# Altium PCB motor_driver.PcbDoc (part 3 of 4)
Units mil, origin at the board's own origin, x right, y up, seen from the top; angles counter-clockwise.
Board outline 2915 x 1500 mil, 2 copper layers (Top Layer, Bottom Layer); 45 components, 39 nets, 213 pads, 173 vias.
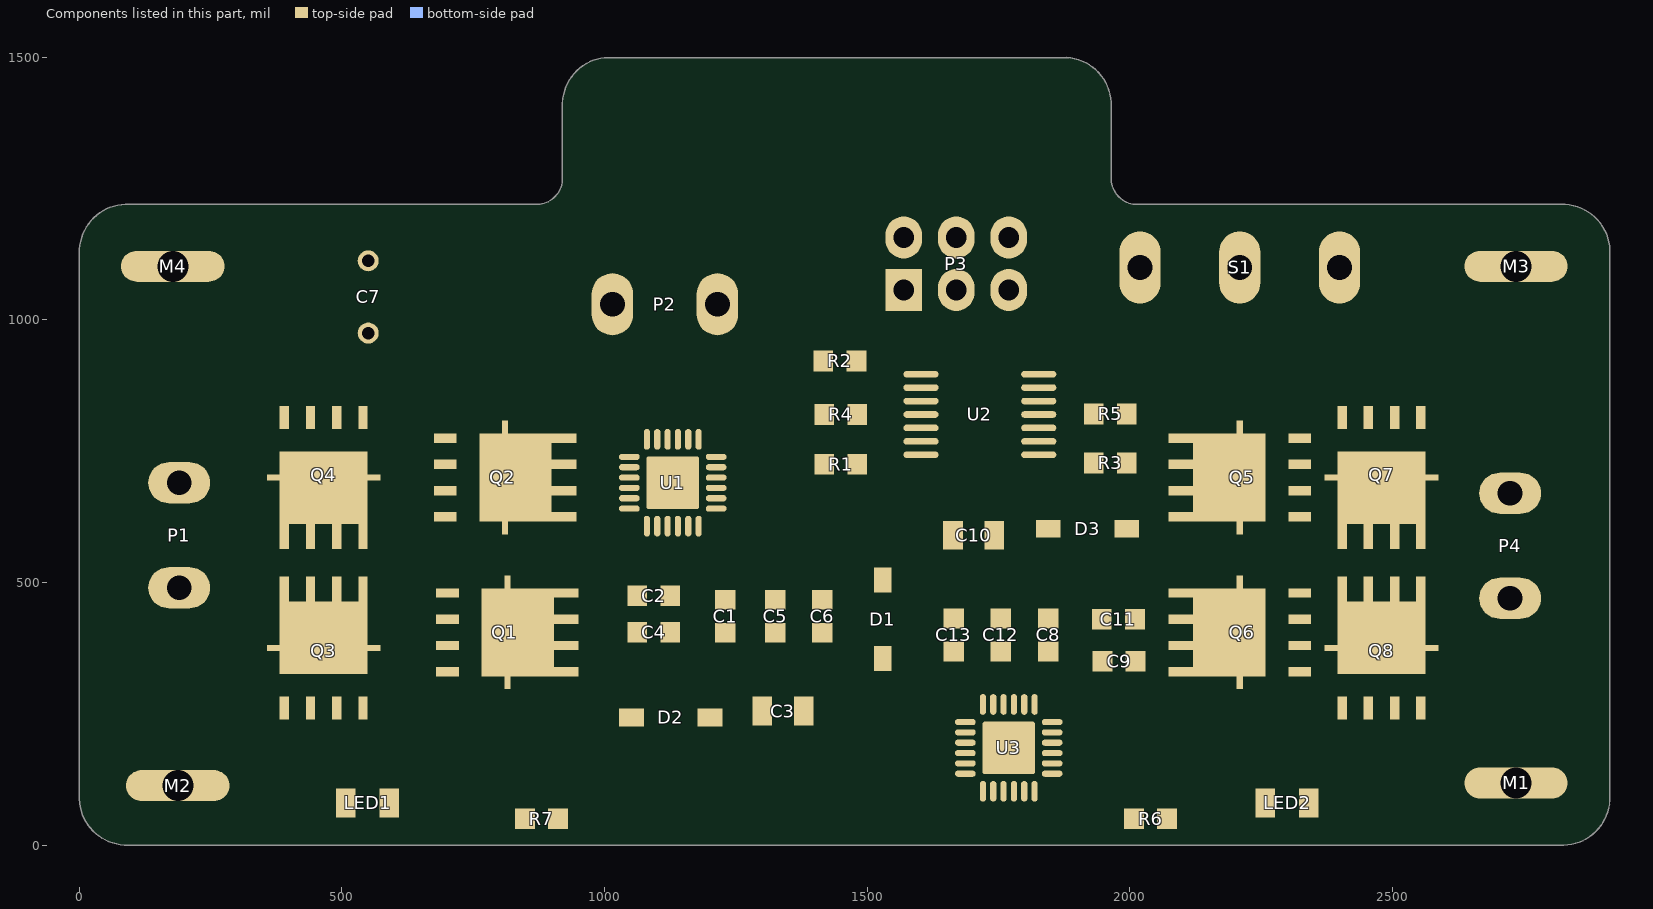
[diagram p3: the components of this part, seen from the top]

## Via types
v1: diameter 22, hole 12, Top Layer to Bottom Layer, tented both sides, 173 vias

## Nets (pads, with @x,y where several pads share a name; then routed paths per layer and width w, separated by ;. In a path a pad name is that pad's centre, name@x,y a point inside that pad or via, vN(x,y) a via of type N, cw(c..) or ccw(c..) an arc to the next point about the centre after c; other vN are vias at no path point) (continued)
copper on no net: (continued)
  Top Layer w1.05: 1421.95,1377.05 1424.05,1377.05 ; 1421.95,1378.1 1426.15,1378.1 ; 1423,1313 1430.35,1313 ; 1423,1314.05 1427.2,1314.05 ; 1423,1379.15 1427.2,1379.15 ; 1424.05,1432.7 1508.05,1432.7 ; 1424.05,1433.75 1507,1433.75 ; 1425.1,1380.2 1429.3,1380.2 ; 1425.1,1431.65 1508.05,1431.65 ; 1426.15,1381.25 1431.4,1381.25 ; 1428.25,1382.3 1433.5,1382.3 ; 1429.3,1302.5 1433.5,1302.5 ; 1429.3,1383.35 1435.6,1383.35 ; 1430.35,1300.4 1434.55,1300.4 ; 1430.35,1301.45 1434.55,1301.45 ; 1431.4,1278.35 1441.9,1278.35 ; 1431.4,1297.25 1436.65,1297.25 ; 1431.4,1298.3 1436.65,1298.3 ; 1431.4,1299.35 1435.6,1299.35 ; 1431.4,1384.4 1436.65,1384.4 ; 1432.45,1279.4 1440.85,1279.4 ; 1432.45,1280.45 1439.8,1280.45 ; 1432.45,1295.15 1438.75,1295.15 ; 1432.45,1296.2 1437.7,1296.2 ; 1432.45,1385.45 1438.75,1385.45 ; 1433.5,1281.5 1437.7,1281.5 ; 1433.5,1293.05 1440.85,1293.05 ; 1433.5,1294.1 1439.8,1294.1 ; 1433.5,1386.5 1439.8,1386.5 ; 1434.55,1282.55 1436.65,1282.55 ; 1434.55,1290.95 1442.95,1290.95 ; 1434.55,1292 1441.9,1292 ; 1434.55,1387.55 1441.9,1387.55 ; 1435.6,1289.9 1444,1289.9 ; 1436.65,1287.8 1446.1,1287.8 ; 1436.65,1288.85 1445.05,1288.85 ; 1436.65,1388.6 1444,1388.6 ; 1437.7,1263.65 1447.15,1263.65 ; 1437.7,1286.75 1447.15,1286.75 ; 1437.7,1389.65 1445.05,1389.65 ; 1438.75,1229 1442.95,1229 ; 1438.75,1230.05 1445.05,1230.05 ; 1438.75,1231.1 1447.15,1231.1 ; 1438.75,1232.15 1447.15,1232.15 ; 1438.75,1233.2 1447.15,1233.2 ; 1438.75,1234.25 1447.15,1234.25 ; 1438.75,1235.3 1447.15,1235.3 ; 1438.75,1236.35 1447.15,1236.35 ; 1438.75,1237.4 1447.15,1237.4 ; 1438.75,1241.6 1447.15,1241.6 ; 1438.75,1242.65 1447.15,1242.65 ; 1438.75,1243.7 1447.15,1243.7 ; 1438.75,1244.75 1447.15,1244.75 ; 1438.75,1245.8 1447.15,1245.8 ; 1438.75,1246.85 1447.15,1246.85 ; 1438.75,1247.9 1447.15,1247.9 ; 1438.75,1248.95 1447.15,1248.95 ; 1438.75,1250 1447.15,1250 ; 1438.75,1251.05 1447.15,1251.05 ; 1438.75,1252.1 1447.15,1252.1 ; 1438.75,1253.15 1447.15,1253.15 ; 1438.75,1254.2 1447.15,1254.2 ; 1438.75,1255.25 1447.15,1255.25 ; 1438.75,1256.3 1447.15,1256.3 ; 1438.75,1257.35 1447.15,1257.35 ; 1438.75,1258.4 1447.15,1258.4 ; 1438.75,1259.45 1449.25,1259.45 ; 1438.75,1264.7 1446.1,1264.7 ; 1438.75,1265.75 1444,1265.75 ; 1438.75,1285.7 1449.25,1285.7 ; 1438.75,1390.7 1446.1,1390.7 ; 1439.8,1266.8 1442.95,1266.8 ; 1439.8,1283.6 1452.4,1283.6 ; 1439.8,1284.65 1450.3,1284.65 ; 1439.8,1391.75 1448.2,1391.75 ; 1440.85,1282.55 1455.55,1282.55 ; 1440.85,1392.8 1449.25,1392.8 ; 1441.9,1281.5 1458.7,1281.5 ; 1441.9,1393.85 1450.3,1393.85 ; 1442.95,1280.45 1460.8,1280.45 ; 1442.95,1394.9 1451.35,1394.9 ; 1444,1279.4 1460.8,1279.4 ; 1444,1395.95 1453.45,1395.95 ; 1445.05,1278.35 1458.7,1278.35 ; 1445.05,1397 1454.5,1397 ; 1446.1,1277.3 1455.55,1277.3 ; 1446.1,1398.05 1455.55,1398.05 ; 1447.15,1276.25 1454.5,1276.25 ; 1447.15,1399.1 1455.55,1399.1 ; 1448.2,1275.2 1453.45,1275.2 ; 1448.2,1400.15 1456.6,1400.15 ; 1449.25,1401.2 1457.65,1401.2 ; 1449.25,1402.25 1458.7,1402.25 ; 1450.3,1274.15 1453.45,1274.15 ; 1450.3,1403.3 1458.7,1403.3 ; 1450.3,1404.35 1459.75,1404.35 ; 1451.35,1405.4 1459.75,1405.4 ; 1452.4,1406.45 1460.8,1406.45 ; 1452.4,1407.5 1460.8,1407.5 ; 1452.4,1408.55 1461.85,1408.55 ; 1453.45,1409.6 1461.85,1409.6 ; 1453.45,1410.65 1462.9,1410.65 ; 1454.5,1411.7 1462.9,1411.7 ; 1454.5,1412.75 1462.9,1412.75 ; 1454.5,1413.8 1463.95,1413.8 ; 1455.55,1414.85 1463.95,1414.85 ; 1455.55,1415.9 1463.95,1415.9 ; 1455.55,1416.95 1463.95,1416.95 ; 1455.55,1418 1465,1418 ; 1456.6,1419.05 1465,1419.05 ; 1456.6,1420.1 1465,1420.1 ; 1456.6,1421.15 1465,1421.15 ; 1456.6,1422.2 1465,1422.2 ; 1456.6,1423.25 1466.05,1423.25 ; 1457.65,1424.3 1466.05,1424.3 ; 1457.65,1425.35 1466.05,1425.35 ; 1457.65,1426.4 1466.05,1426.4 ; 1457.65,1427.45 1466.05,1427.45 ; 1457.65,1428.5 1466.05,1428.5 ; 1457.65,1429.55 1466.05,1429.55 ; 1457.65,1430.6 1466.05,1430.6 ; 1457.65,1434.8 1467.1,1434.8 ; 1457.65,1458.95 1470.25,1458.95 ; 1457.65,1460 1471.3,1460 ; 1457.65,1461.05 1470.25,1461.05 ; 1457.65,1462.1 1467.1,1462.1 ; 1457.65,1463.15 1462.9,1463.15 ; 1458.7,1435.85 1467.1,1435.85 ; 1458.7,1436.9 1467.1,1436.9 ; 1458.7,1437.95 1467.1,1437.95 ; 1458.7,1439 1467.1,1439 ; 1458.7,1440.05 1467.1,1440.05 ; 1458.7,1441.1 1467.1,1441.1 ; 1458.7,1442.15 1467.1,1442.15 ; 1458.7,1443.2 1467.1,1443.2 ; 1458.7,1444.25 1467.1,1444.25 ; 1458.7,1445.3 1467.1,1445.3 ; 1458.7,1446.35 1467.1,1446.35 ; 1458.7,1447.4 1467.1,1447.4 ; 1458.7,1448.45 1467.1,1448.45 ; 1458.7,1449.5 1467.1,1449.5 ; 1458.7,1450.55 1467.1,1450.55 ; 1458.7,1451.6 1467.1,1451.6 ; 1458.7,1452.65 1467.1,1452.65 ; 1458.7,1453.7 1467.1,1453.7 ; 1458.7,1454.75 1467.1,1454.75 ; 1458.7,1455.8 1468.15,1455.8 ; 1458.7,1456.85 1468.15,1456.85 ; 1458.7,1457.9 1469.2,1457.9 ; 1467.1,1239.5 1554.25,1239.5 ; 1468.15,1238.45 1555.3,1238.45 ; 1469.2,1237.4 1555.3,1237.4 ; 1469.2,1425.35 1473.4,1425.35 ; 1469.2,1426.4 1472.35,1426.4 ; 1469.2,1427.45 1472.35,1427.45 ; 1469.2,1428.5 1472.35,1428.5 ; 1469.2,1429.55 1471.3,1429.55 ; 1469.2,1430.6 1471.3,1430.6 ; 1470.25,1420.1 1474.45,1420.1 ; 1470.25,1421.15 1474.45,1421.15 ; 1470.25,1422.2 1474.45,1422.2 ; 1470.25,1423.25 1473.4,1423.25 ; 1470.25,1424.3 1473.4,1424.3 ; 1471.3,1414.85 1476.55,1414.85 ; 1471.3,1415.9 1476.55,1415.9 ; 1471.3,1416.95 1476.55,1416.95 ; 1471.3,1418 1475.5,1418 ; 1471.3,1419.05 1475.5,1419.05 ; 1472.35,1411.7 1478.65,1411.7 ; 1472.35,1412.75 1477.6,1412.75 ; 1472.35,1413.8 1477.6,1413.8 ; 1473.4,1408.55 1480.75,1408.55 ; 1473.4,1409.6 1479.7,1409.6 ; 1473.4,1410.65 1478.65,1410.65 ; 1474.45,1300.4 1549,1300.4 ; 1474.45,1406.45 1481.8,1406.45 ; 1474.45,1407.5 1480.75,1407.5 ; 1475.5,1299.35 1550.05,1299.35 ; 1475.5,1403.3 1483.9,1403.3 ; 1475.5,1404.35 1482.85,1404.35 ; 1475.5,1405.4 1482.85,1405.4 ; 1476.55,1298.3 1550.05,1298.3 ; 1476.55,1401.2 1486,1401.2 ; 1476.55,1402.25 1484.95,1402.25 ; 1477.6,1399.1 1488.1,1399.1 ; 1477.6,1400.15 1487.05,1400.15 ; 1478.65,1398.05 1489.15,1398.05 ; 1479.7,1395.95 1491.25,1395.95 ; 1479.7,1397 1490.2,1397 ; 1480.75,1393.85 1494.4,1393.85 ; 1480.75,1394.9 1492.3,1394.9 ; 1481.8,1392.8 1495.45,1392.8 ; 1482.85,1391.75 1496.5,1391.75 ; 1483.9,1389.65 1499.65,1389.65 ; 1483.9,1390.7 1498.6,1390.7 ; 1484.95,1388.6 1501.75,1388.6 ; 1486,1387.55 1503.85,1387.55 ; 1487.05,1386.5 1505.95,1386.5 ; 1488.1,1385.45 1508.05,1385.45 ; 1489.15,1384.4 1510.15,1384.4 ; 1490.2,1383.35 1510.15,1383.35 ; 1491.25,1382.3 1500.7,1382.3 ; 1492.3,1381.25 1498.6,1381.25 ; 1492.3,1434.8 1505.95,1434.8 ; 1493.35,1380.2 1497.55,1380.2 ; 1493.35,1435.85 1504.9,1435.85 ; 1494.4,1379.15 1495.45,1379.15 ; 1494.4,1436.9 1503.85,1436.9 ; 1494.4,1437.95 1502.8,1437.95 ; 1495.45,1439 1501.75,1439 ; 1496.5,1440.05 1500.7,1440.05 ; 1497.55,1441.1 1499.65,1441.1 ; 1505.95,1240.55 1515.4,1240.55 ; 1505.95,1241.6 1515.4,1241.6 ; 1505.95,1242.65 1515.4,1242.65 ; 1505.95,1243.7 1515.4,1243.7 ; 1505.95,1244.75 1515.4,1244.75 ; 1505.95,1245.8 1515.4,1245.8 ; 1505.95,1246.85 1515.4,1246.85 ; 1505.95,1247.9 1515.4,1247.9 ; 1505.95,1248.95 1515.4,1248.95 ; 1505.95,1250 1515.4,1250 ; 1505.95,1251.05 1515.4,1251.05 ; 1505.95,1252.1 1515.4,1252.1 ; 1505.95,1253.15 1515.4,1253.15 ; 1505.95,1254.2 1515.4,1254.2 ; 1505.95,1255.25 1515.4,1255.25 ; 1505.95,1256.3 1515.4,1256.3 ; 1505.95,1257.35 1515.4,1257.35 ; 1505.95,1258.4 1515.4,1258.4 ; 1505.95,1259.45 1515.4,1259.45 ; 1505.95,1260.5 1515.4,1260.5 ; 1505.95,1261.55 1515.4,1261.55 ; 1505.95,1262.6 1515.4,1262.6 ; 1505.95,1263.65 1515.4,1263.65 ; 1505.95,1264.7 1515.4,1264.7 ; 1505.95,1265.75 1515.4,1265.75 ; 1505.95,1266.8 1515.4,1266.8 ; 1505.95,1267.85 1515.4,1267.85 ; 1505.95,1268.9 1515.4,1268.9 ; 1505.95,1269.95 1515.4,1269.95 ; 1505.95,1271 1515.4,1271 ; 1505.95,1272.05 1515.4,1272.05 ; 1505.95,1273.1 1515.4,1273.1 ; 1505.95,1274.15 1515.4,1274.15 ; 1505.95,1275.2 1515.4,1275.2 ; 1505.95,1276.25 1515.4,1276.25 ; 1505.95,1277.3 1515.4,1277.3 ; 1505.95,1278.35 1515.4,1278.35 ; 1505.95,1279.4 1515.4,1279.4 ; 1505.95,1280.45 1515.4,1280.45 ; 1505.95,1281.5 1515.4,1281.5 ; 1505.95,1282.55 1515.4,1282.55 ; 1505.95,1283.6 1515.4,1283.6 ; 1505.95,1284.65 1515.4,1284.65 ; 1505.95,1285.7 1515.4,1285.7 ; 1505.95,1286.75 1515.4,1286.75 ; 1505.95,1287.8 1515.4,1287.8 ; 1505.95,1288.85 1515.4,1288.85 ; 1505.95,1289.9 1515.4,1289.9 ; 1505.95,1290.95 1515.4,1290.95 ; 1505.95,1292 1515.4,1292 ; 1505.95,1293.05 1515.4,1293.05 ; 1505.95,1294.1 1515.4,1294.1 ; 1505.95,1295.15 1515.4,1295.15 ; 1505.95,1296.2 1515.4,1296.2 ; 1505.95,1297.25 1515.4,1297.25 ; 1518.55,1423.25 1528,1423.25 ; 1518.55,1424.3 1529.05,1424.3 ; 1518.55,1425.35 1529.05,1425.35 ; 1519.6,1405.4 1605.7,1405.4 ; 1519.6,1406.45 1604.65,1406.45 ; 1519.6,1422.2 1526.95,1422.2 ; 1519.6,1426.4 1530.1,1426.4 ; 1519.6,1427.45 1530.1,1427.45 ; 1520.65,1404.35 1604.65,1404.35 ; 1520.65,1428.5 1530.1,1428.5 ; 1521.7,1421.15 1523.8,1421.15 ; 1521.7,1429.55 1530.1,1429.55 ; 1522.75,1430.6 1530.1,1430.6 ; 1523.8,1431.65 1530.1,1431.65 ; 1524.85,1432.7 1531.15,1432.7 ; 1524.85,1433.75 1531.15,1433.75 ; 1525.9,1434.8 1531.15,1434.8 ; 1525.9,1435.85 1603.6,1435.85 ; 1526.95,1436.9 1602.55,1436.9 ; 1526.95,1437.95 1601.5,1437.95 ; 1526.95,1439 1530.1,1439 ; 1526.95,1440.05 1530.1,1440.05 ; 1528,1441.1 1530.1,1441.1 ; 1528,1442.15 1530.1,1442.15 ; 1528,1443.2 1530.1,1443.2 ; 1531.15,1457.9 1537.45,1457.9 ; 1531.15,1458.95 1535.35,1458.95 ; 1531.15,1460 1533.25,1460 ; 1532.2,1456.85 1538.5,1456.85 ; 1533.25,1301.45 1547.95,1301.45 ; 1533.25,1425.35 1588.9,1425.35 ; 1533.25,1455.8 1540.6,1455.8 ; 1534.3,1302.5 1546.9,1302.5 ; 1534.3,1423.25 1586.8,1423.25 ; 1534.3,1424.3 1586.8,1424.3 ; 1534.3,1454.75 1541.65,1454.75 ; 1535.35,1303.55 1545.85,1303.55 ; 1535.35,1452.65 1544.8,1452.65 ; 1535.35,1453.7 1543.75,1453.7 ; 1536.4,1304.6 1544.8,1304.6 ; 1536.4,1305.65 1542.7,1305.65 ; 1536.4,1450.55 1546.9,1450.55 ; 1536.4,1451.6 1545.85,1451.6 ; 1537.45,1306.7 1541.65,1306.7 ; 1537.45,1448.45 1546.9,1448.45 ; 1537.45,1449.5 1546.9,1449.5 ; 1538.5,1240.55 1553.2,1240.55 ; 1538.5,1241.6 1552.15,1241.6 ; 1538.5,1445.3 1546.9,1445.3 ; 1538.5,1446.35 1546.9,1446.35 ; 1538.5,1447.4 1546.9,1447.4 ; 1539.55,1242.65 1551.1,1242.65 ; 1539.55,1443.2 1545.85,1443.2 ; 1539.55,1444.25 1546.9,1444.25 ; 1540.6,1243.7 1550.05,1243.7 ; 1540.6,1244.75 1549,1244.75 ; 1540.6,1386.5 1565.8,1386.5 ; 1540.6,1387.55 1545.85,1387.55 ; 1540.6,1441.1 1544.8,1441.1 ; 1540.6,1442.15 1545.85,1442.15 ; 1541.65,1245.8 1546.9,1245.8 ; 1542.7,1246.85 1545.85,1246.85 ; 1543.75,1385.45 1565.8,1385.45 ; 1545.85,1384.4 1565.8,1384.4 ; 1547.95,1383.35 1564.75,1383.35 ; 1550.05,1382.3 1564.75,1382.3 ; 1551.1,1380.2 1562.65,1380.2 ; 1551.1,1381.25 1563.7,1381.25 ; 1552.15,1377.05 1555.3,1377.05 ; 1552.15,1378.1 1558.45,1378.1 ; 1552.15,1379.15 1560.55,1379.15 ; 1553.2,1461.05 1557.4,1461.05 ; 1553.2,1462.1 1556.35,1462.1 ; 1553.2,1463.15 1555.3,1463.15 ; 1554.25,1460 1558.45,1460 ; 1555.3,1387.55 1565.8,1387.55 ; 1555.3,1457.9 1561.6,1457.9 ; 1555.3,1458.95 1560.55,1458.95 ; 1556.35,1388.6 1565.8,1388.6 ; 1556.35,1454.75 1564.75,1454.75 ; 1556.35,1455.8 1563.7,1455.8 ; 1556.35,1456.85 1562.65,1456.85 ; 1557.4,1389.65 1565.8,1389.65 ; 1557.4,1390.7 1565.8,1390.7 ; 1557.4,1391.75 1565.8,1391.75 ; 1557.4,1392.8 1565.8,1392.8 ; 1557.4,1393.85 1565.8,1393.85 ; 1557.4,1394.9 1565.8,1394.9 ; 1557.4,1395.95 1565.8,1395.95 ; 1557.4,1397 1565.8,1397 ; 1557.4,1398.05 1565.8,1398.05 ; 1557.4,1399.1 1565.8,1399.1 ; 1557.4,1400.15 1565.8,1400.15 ; 1557.4,1401.2 1565.8,1401.2 ; 1557.4,1402.25 1565.8,1402.25 ; 1557.4,1403.3 1565.8,1403.3 ; 1557.4,1407.5 1565.8,1407.5 ; 1557.4,1408.55 1565.8,1408.55 ; 1557.4,1409.6 1565.8,1409.6 ; 1557.4,1410.65 1565.8,1410.65 ; 1557.4,1411.7 1565.8,1411.7 ; 1557.4,1412.75 1566.85,1412.75 ; 1557.4,1413.8 1567.9,1413.8 ; 1557.4,1414.85 1561.6,1414.85 ; 1557.4,1451.6 1566.85,1451.6 ; 1557.4,1452.65 1565.8,1452.65 ; 1557.4,1453.7 1565.8,1453.7 ; 1558.45,1446.35 1566.85,1446.35 ; 1558.45,1447.4 1567.9,1447.4 ; 1558.45,1448.45 1567.9,1448.45 ; 1558.45,1449.5 1566.85,1449.5 ; 1558.45,1450.55 1566.85,1450.55 ; 1559.5,1442.15 1564.75,1442.15 ; 1559.5,1443.2 1565.8,1443.2 ; 1559.5,1444.25 1566.85,1444.25 ; 1559.5,1445.3 1566.85,1445.3 ; 1560.55,1441.1 1563.7,1441.1 ; 1562.65,1258.4 1580.5,1258.4 ; 1563.7,1257.35 1580.5,1257.35 ; 1564.75,1287.8 1571.05,1287.8 ; 1564.75,1288.85 1568.95,1288.85 ; 1564.75,1289.9 1565.8,1289.9 ; 1564.75,1414.85 1570,1414.85 ; 1565.8,1286.75 1573.15,1286.75 ; 1565.8,1415.9 1572.1,1415.9 ; 1566.85,1285.7 1574.2,1285.7 ; 1566.85,1416.95 1574.2,1416.95 ; 1567.9,1256.3 1580.5,1256.3 ; 1567.9,1283.6 1577.35,1283.6 ; 1567.9,1284.65 1576.3,1284.65 ; 1567.9,1418 1576.3,1418 ; 1568.95,1281.5 1578.4,1281.5 ; 1568.95,1282.55 1578.4,1282.55 ; 1568.95,1419.05 1579.45,1419.05 ; 1570,1255.25 1580.5,1255.25 ; 1570,1278.35 1579.45,1278.35 ; 1570,1279.4 1579.45,1279.4 ; 1570,1280.45 1579.45,1280.45 ; 1570,1420.1 1587.85,1420.1 ; 1571.05,1232.15 1581.55,1232.15 ; 1571.05,1233.2 1581.55,1233.2 ; 1571.05,1234.25 1581.55,1234.25 ; 1571.05,1235.3 1581.55,1235.3 ; 1571.05,1236.35 1581.55,1236.35 ; 1571.05,1237.4 1581.55,1237.4 ; 1571.05,1238.45 1581.55,1238.45 ; 1571.05,1254.2 1580.5,1254.2 ; 1571.05,1275.2 1578.4,1275.2 ; 1571.05,1276.25 1578.4,1276.25 ; 1571.05,1277.3 1579.45,1277.3 ; 1571.05,1311.95 1578.4,1311.95 ; 1571.05,1313 1576.3,1313 ; 1571.05,1421.15 1587.85,1421.15 ; 1571.05,1439 1575.25,1439 ; 1572.1,1231.1 1580.5,1231.1 ; 1572.1,1239.5 1580.5,1239.5 ; 1572.1,1240.55 1580.5,1240.55 ; 1572.1,1241.6 1580.5,1241.6 ; 1572.1,1242.65 1580.5,1242.65 ; 1572.1,1243.7 1580.5,1243.7 ; 1572.1,1244.75 1580.5,1244.75 ; 1572.1,1245.8 1580.5,1245.8 ; 1572.1,1246.85 1580.5,1246.85 ; 1572.1,1247.9 1580.5,1247.9 ; 1572.1,1248.95 1579.45,1248.95 ; 1572.1,1250 1579.45,1250 ; 1572.1,1251.05 1579.45,1251.05 ; 1572.1,1252.1 1579.45,1252.1 ; 1572.1,1253.15 1579.45,1253.15 ; 1572.1,1259.45 1580.5,1259.45 ; 1572.1,1273.1 1576.3,1273.1 ; 1572.1,1274.15 1577.35,1274.15 ; 1572.1,1310.9 1581.55,1310.9 ; 1572.1,1422.2 1587.85,1422.2 ; 1572.1,1440.05 1576.3,1440.05 ; 1572.1,1441.1 1577.35,1441.1 ; 1573.15,1230.05 1580.5,1230.05 ; 1573.15,1272.05 1575.25,1272.05 ; 1573.15,1309.85 1582.6,1309.85 ; 1573.15,1442.15 1577.35,1442.15 ; 1573.15,1443.2 1578.4,1443.2 ; 1574.2,1260.5 1581.55,1260.5 ; 1574.2,1308.8 1584.7,1308.8 ; 1574.2,1426.4 1582.6,1426.4 ; 1574.2,1444.25 1579.45,1444.25 ; 1574.2,1445.3 1580.5,1445.3 ; 1575.25,1261.55 1581.55,1261.55 ; 1575.25,1262.6 1581.55,1262.6 ; 1575.25,1306.7 1586.8,1306.7 ; 1575.25,1307.75 1585.75,1307.75 ; 1575.25,1427.45 1581.55,1427.45 ; 1575.25,1446.35 1581.55,1446.35 ; 1575.25,1447.4 1582.6,1447.4 ; 1575.25,1448.45 1582.6,1448.45 ; 1576.3,1229 1579.45,1229 ; 1576.3,1263.65 1581.55,1263.65 ; 1576.3,1264.7 1582.6,1264.7 ; 1576.3,1304.6 1586.8,1304.6 ; 1576.3,1305.65 1586.8,1305.65 ; 1576.3,1449.5 1583.65,1449.5 ; 1576.3,1450.55 1584.7,1450.55 ; 1577.35,1265.75 1582.6,1265.75 ; 1577.35,1266.8 1582.6,1266.8 ; 1577.35,1302.5 1586.8,1302.5 ; 1577.35,1303.55 1586.8,1303.55 ; 1577.35,1428.5 1580.5,1428.5 ; 1577.35,1451.6 1585.75,1451.6 ; 1577.35,1452.65 1586.8,1452.65 ; 1577.35,1453.7 1587.85,1453.7 ; 1578.4,1267.85 1583.65,1267.85 ; 1578.4,1268.9 1583.65,1268.9 ; 1578.4,1269.95 1583.65,1269.95 ; 1578.4,1300.4 1586.8,1300.4 ; 1578.4,1301.45 1586.8,1301.45 ; 1578.4,1454.75 1589.95,1454.75 ; 1578.4,1455.8 1591,1455.8 ; 1578.4,1456.85 1591,1456.85 ; 1579.45,1271 1584.7,1271 ; 1579.45,1272.05 1584.7,1272.05 ; 1579.45,1297.25 1584.7,1297.25 ; 1579.45,1298.3 1585.75,1298.3 ; 1579.45,1299.35 1585.75,1299.35 ; 1579.45,1457.9 1588.9,1457.9 ; 1579.45,1458.95 1587.85,1458.95 ; 1580.5,1273.1 1584.7,1273.1 ; 1580.5,1274.15 1584.7,1274.15 ; 1580.5,1296.2 1583.65,1296.2 ; 1580.5,1460 1585.75,1460 ; 1580.5,1461.05 1584.7,1461.05 ; 1580.5,1462.1 1582.6,1462.1 ; 1581.55,1275.2 1585.75,1275.2 ; 1581.55,1276.25 1585.75,1276.25 ; 1582.6,1232.15 1585.75,1232.15 ; 1582.6,1277.3 1585.75,1277.3 ; 1582.6,1278.35 1586.8,1278.35 ; 1583.65,1233.2 1587.85,1233.2 ; 1583.65,1279.4 1586.8,1279.4 ; 1583.65,1280.45 1586.8,1280.45 ; 1583.65,1281.5 1586.8,1281.5 ; 1584.7,1234.25 1588.9,1234.25 ; 1584.7,1282.55 1587.85,1282.55 ; 1584.7,1283.6 1587.85,1283.6 ; 1585.75,1235.3 1591,1235.3 ; 1585.75,1284.65 1587.85,1284.65 ; 1585.75,1285.7 1588.9,1285.7 ; 1585.75,1426.4 1589.95,1426.4 ; 1586.8,1236.35 1592.05,1236.35 ; 1586.8,1286.75 1588.9,1286.75 ; 1586.8,1287.8 1588.9,1287.8 ; 1586.8,1427.45 1591,1427.45 ; 1586.8,1428.5 1592.05,1428.5 ; 1587.85,1237.4 1594.15,1237.4 ; 1587.85,1288.85 1589.95,1288.85 ; 1587.85,1289.9 1589.95,1289.9 ; 1587.85,1429.55 1594.15,1429.55 ; 1588.9,1238.45 1595.2,1238.45 ; 1588.9,1267.85 1648.75,1267.85 ; 1588.9,1407.5 1603.6,1407.5 ; 1588.9,1430.6 1595.2,1430.6 ; 1588.9,1431.65 1597.3,1431.65 ; 1589.95,1239.5 1596.25,1239.5 ; 1589.95,1265.75 1648.75,1265.75 ; 1589.95,1266.8 1648.75,1266.8 ; 1589.95,1273.1 1592.05,1273.1 ; 1589.95,1274.15 1593.1,1274.15 ; 1589.95,1292 1599.4,1292 ; 1589.95,1293.05 1600.45,1293.05 ; 1589.95,1294.1 1600.45,1294.1 ; 1589.95,1295.15 1601.5,1295.15 ; 1589.95,1408.55 1602.55,1408.55 ; 1589.95,1409.6 1601.5,1409.6 ; 1589.95,1432.7 1602.55,1432.7 ; 1591,1240.55 1598.35,1240.55 ; 1591,1275.2 1595.2,1275.2 ; 1591,1290.95 1597.3,1290.95 ; 1591,1296.2 1601.5,1296.2 ; 1591,1410.65 1600.45,1410.65 ; 1591,1433.75 1603.6,1433.75 ; 1591,1434.8 1603.6,1434.8 ; 1591,1439 1600.45,1439 ; 1592.05,1241.6 1599.4,1241.6 ; 1592.05,1276.25 1596.25,1276.25 ; 1592.05,1297.25 1601.5,1297.25 ; 1592.05,1411.7 1599.4,1411.7 ; 1592.05,1412.75 1598.35,1412.75 ; 1592.05,1440.05 1598.35,1440.05 ; 1592.05,1441.1 1597.3,1441.1 ; 1593.1,1242.65 1600.45,1242.65 ; 1593.1,1277.3 1598.35,1277.3 ; 1593.1,1298.3 1601.5,1298.3 ; 1593.1,1413.8 1597.3,1413.8 ; 1593.1,1442.15 1596.25,1442.15 ; 1594.15,1243.7 1601.5,1243.7 ; 1594.15,1278.35 1599.4,1278.35 ; 1594.15,1299.35 1601.5,1299.35 ; 1594.15,1414.85 1595.2,1414.85 ; 1595.2,1244.75 1602.55,1244.75 ; 1595.2,1279.4 1600.45,1279.4 ; 1595.2,1300.4 1601.5,1300.4 ; 1595.2,1301.45 1601.5,1301.45 ; 1596.25,1245.8 1603.6,1245.8 ; 1596.25,1280.45 1602.55,1280.45 ; 1596.25,1302.5 1601.5,1302.5 ; 1596.25,1303.55 1601.5,1303.55 ; 1597.3,1246.85 1604.65,1246.85 ; 1597.3,1281.5 1603.6,1281.5 ; 1597.3,1304.6 1649.8,1304.6 ; 1597.3,1305.65 1649.8,1305.65 ; 1598.35,1247.9 1605.7,1247.9 ; 1598.35,1282.55 1604.65,1282.55 ; 1598.35,1283.6 1605.7,1283.6 ; 1598.35,1306.7 1648.75,1306.7 ; 1598.35,1307.75 1601.5,1307.75 ; 1598.35,1308.8 1601.5,1308.8 ; 1598.35,1309.85 1601.5,1309.85 ; 1599.4,1248.95 1606.75,1248.95 ; 1599.4,1250 1607.8,1250 ; 1599.4,1284.65 1607.8,1284.65 ; 1599.4,1310.9 1601.5,1310.9 ; 1599.4,1311.95 1601.5,1311.95 ; 1600.45,1251.05 1608.85,1251.05 ; 1600.45,1285.7 1608.85,1285.7 ; 1601.5,1252.1 1608.85,1252.1 ; 1601.5,1286.75 1609.9,1286.75 ; 1601.5,1287.8 1610.95,1287.8 ; 1602.55,1253.15 1609.9,1253.15 ; 1602.55,1254.2 1610.95,1254.2 ; 1602.55,1288.85 1612,1288.85 ; 1603.6,1255.25 1612,1255.25 ; 1603.6,1289.9 1613.05,1289.9 ; 1603.6,1290.95 1614.1,1290.95 ; 1604.65,1256.3 1612,1256.3 ; 1604.65,1292 1618.3,1292 ; 1605.7,1257.35 1621.45,1257.35 ; 1605.7,1258.4 1621.45,1258.4 ; 1605.7,1293.05 1618.3,1293.05 ; 1605.7,1294.1 1617.25,1294.1 ; 1606.75,1259.45 1621.45,1259.45 ; 1606.75,1295.15 1615.15,1295.15 ; 1606.75,1296.2 1614.1,1296.2 ; 1607.8,1260.5 1621.45,1260.5 ; 1607.8,1261.55 1621.45,1261.55 ; 1607.8,1297.25 1612,1297.25 ; 1607.8,1298.3 1610.95,1298.3 ; 1608.85,1262.6 1621.45,1262.6 ; 1608.85,1263.65 1621.45,1263.65 ; 1609.9,1264.7 1621.45,1264.7 ; 1613.05,1227.95 1616.2,1227.95 ; 1613.05,1229 1619.35,1229 ; 1613.05,1230.05 1621.45,1230.05 ; 1613.05,1231.1 1621.45,1231.1 ; 1613.05,1232.15 1621.45,1232.15 ; 1613.05,1233.2 1621.45,1233.2 ; 1613.05,1234.25 1621.45,1234.25 ; 1613.05,1235.3 1621.45,1235.3 ; 1613.05,1236.35 1621.45,1236.35 ; 1613.05,1237.4 1621.45,1237.4 ; 1613.05,1238.45 1621.45,1238.45 ; 1613.05,1239.5 1621.45,1239.5 ; 1613.05,1240.55 1621.45,1240.55 ; 1613.05,1241.6 1621.45,1241.6 ; 1613.05,1242.65 1621.45,1242.65 ; 1613.05,1243.7 1621.45,1243.7 ; 1613.05,1244.75 1621.45,1244.75 ; 1613.05,1245.8 1621.45,1245.8 ; 1613.05,1246.85 1621.45,1246.85 ; 1613.05,1247.9 1621.45,1247.9 ; 1613.05,1248.95 1621.45,1248.95 ; 1613.05,1250 1621.45,1250 ; 1613.05,1251.05 1621.45,1251.05 ; 1613.05,1252.1 1621.45,1252.1 ; 1613.05,1253.15 1621.45,1253.15 ; 1613.05,1254.2 1621.45,1254.2 ; 1613.05,1255.25 1621.45,1255.25 ; 1613.05,1256.3 1621.45,1256.3 ; 1613.05,1268.9 1621.45,1268.9 ; 1613.05,1269.95 1621.45,1269.95 ; 1613.05,1271 1621.45,1271 ; 1613.05,1272.05 1621.45,1272.05 ; 1613.05,1273.1 1621.45,1273.1 ; 1613.05,1274.15 1621.45,1274.15 ; 1613.05,1275.2 1621.45,1275.2 ; 1613.05,1276.25 1621.45,1276.25 ; 1613.05,1277.3 1621.45,1277.3 ; 1613.05,1278.35 1622.5,1278.35 ; 1613.05,1279.4 1624.6,1279.4 ; 1613.05,1280.45 1624.6,1280.45 ; 1613.05,1281.5 1623.55,1281.5 ; 1613.05,1282.55 1621.45,1282.55 ; 1613.05,1283.6 1618.3,1283.6 ; 1621.45,1296.2 1626.7,1296.2 ; 1621.45,1297.25 1624.6,1297.25 ; 1622.5,1295.15 1629.85,1295.15 ; 1623.55,1262.6 1626.7,1262.6 ; 1623.55,1263.65 1626.7,1263.65 ; 1623.55,1264.7 1626.7,1264.7 ; 1623.55,1294.1 1631.95,1294.1 ; 1624.6,1258.4 1628.8,1258.4 ; 1624.6,1259.45 1628.8,1259.45 ; 1624.6,1260.5 1627.75,1260.5 ; 1624.6,1261.55 1627.75,1261.55 ; 1624.6,1293.05 1635.1,1293.05 ; 1625.65,1255.25 1630.9,1255.25 ; 1625.65,1256.3 1630.9,1256.3 ; 1625.65,1257.35 1629.85,1257.35 ; 1626.7,1252.1 1634.05,1252.1 ; 1626.7,1253.15 1633,1253.15 ; 1626.7,1254.2 1631.95,1254.2 ; 1626.7,1292 1637.2,1292 ; 1627.75,1250 1636.15,1250 ; 1627.75,1251.05 1635.1,1251.05 ; 1627.75,1290.95 1638.25,1290.95 ; 1628.8,1247.9 1638.25,1247.9 ; 1628.8,1248.95 1637.2,1248.95 ; 1628.8,1289.9 1640.35,1289.9 ; 1629.85,1245.8 1641.4,1245.8 ; 1629.85,1246.85 1639.3,1246.85 ; 1629.85,1288.85 1641.4,1288.85 ; 1630.9,1244.75 1642.45,1244.75 ; 1630.9,1287.8 1641.4,1287.8 ; 1631.95,1242.65 1646.65,1242.65 ; 1631.95,1243.7 1644.55,1243.7 ; 1631.95,1286.75 1642.45,1286.75 ; 1633,1241.6 1648.75,1241.6 ; 1633,1285.7 1642.45,1285.7 ; 1634.05,1239.5 1651.9,1239.5 ; 1634.05,1240.55 1650.85,1240.55 ; 1634.05,1283.6 1642.45,1283.6 ; 1634.05,1284.65 1642.45,1284.65 ; 1634.05,1295.15 1637.2,1295.15 ; 1635.1,1238.45 1645.6,1238.45 ; 1635.1,1282.55 1642.45,1282.55 ; 1635.1,1294.1 1636.15,1294.1 ; 1635.1,1296.2 1638.25,1296.2 ; 1635.1,1297.25 1639.3,1297.25 ; 1635.1,1298.3 1640.35,1298.3 ; 1636.15,1237.4 1643.5,1237.4 ; 1636.15,1268.9 1647.7,1268.9 ; 1636.15,1281.5 1642.45,1281.5 ; 1636.15,1299.35 1642.45,1299.35 ; 1636.15,1300.4 1644.55,1300.4 ; 1636.15,1301.45 1649.8,1301.45 ; 1637.2,1236.35 1642.45,1236.35 ; 1637.2,1269.95 1646.65,1269.95 ; 1637.2,1271 1645.6,1271 ; 1637.2,1279.4 1642.45,1279.4 ; 1637.2,1280.45 1642.45,1280.45 ; 1637.2,1302.5 1650.85,1302.5 ; 1637.2,1303.55 1650.85,1303.55 ; 1637.2,1307.75 1647.7,1307.75 ; 1638.25,1235.3 1641.4,1235.3 ; 1638.25,1272.05 1644.55,1272.05 ; 1638.25,1278.35 1641.4,1278.35 ; 1638.25,1308.8 1646.65,1308.8 ; 1639.3,1273.1 1643.5,1273.1 ; 1639.3,1274.15 1641.4,1274.15 ; 1639.3,1309.85 1645.6,1309.85 ; 1639.3,1310.9 1644.55,1310.9 ; 1640.35,1311.95 1643.5,1311.95 ; 1669.75,1416.95 1679.2,1416.95 ; 1669.75,1418 1679.2,1418 ; 1669.75,1419.05 1679.2,1419.05 ; 1669.75,1420.1 1679.2,1420.1 ; 1669.75,1421.15 1679.2,1421.15 ; 1669.75,1422.2 1679.2,1422.2 ; 1669.75,1423.25 1679.2,1423.25 ; 1669.75,1424.3 1679.2,1424.3 ; 1670.8,1408.55 1680.25,1408.55 ; 1670.8,1409.6 1680.25,1409.6 ; 1670.8,1410.65 1679.2,1410.65 ; 1670.8,1411.7 1679.2,1411.7 ; 1670.8,1412.75 1679.2,1412.75 ; 1670.8,1413.8 1679.2,1413.8 ; 1670.8,1414.85 1679.2,1414.85 ; 1670.8,1415.9 1679.2,1415.9 ; 1670.8,1425.35 1679.2,1425.35 ; 1670.8,1426.4 1679.2,1426.4 ; 1670.8,1427.45 1679.2,1427.45 ; 1670.8,1428.5 1679.2,1428.5 ; 1670.8,1429.55 1680.25,1429.55 ; 1670.8,1430.6 1680.25,1430.6 ; 1671.85,1404.35 1681.3,1404.35 ; 1671.85,1405.4 1680.25,1405.4 ; 1671.85,1406.45 1680.25,1406.45 ; 1671.85,1407.5 1680.25,1407.5 ; 1671.85,1431.65 1680.25,1431.65 ; 1671.85,1432.7 1680.25,1432.7 ; 1671.85,1433.75 1681.3,1433.75 ; 1672.9,1401.2 1681.3,1401.2 ; 1672.9,1402.25 1681.3,1402.25 ; 1672.9,1403.3 1681.3,1403.3 ; 1672.9,1434.8 1681.3,1434.8 ; 1672.9,1435.85 1681.3,1435.85 ; 1672.9,1436.9 1681.3,1436.9 ; 1673.95,1399.1 1682.35,1399.1 ; 1673.95,1400.15 1682.35,1400.15 ; 1673.95,1437.95 1682.35,1437.95 ; 1673.95,1439 1682.35,1439 ; 1675,1397 1683.4,1397 ; 1675,1398.05 1682.35,1398.05 ; 1675,1440.05 1682.35,1440.05 ; 1675,1441.1 1683.4,1441.1 ; 1676.05,1394.9 1684.45,1394.9 ; 1676.05,1395.95 1683.4,1395.95 ; 1676.05,1442.15 1683.4,1442.15 ; 1676.05,1443.2 1684.45,1443.2 ; 1677.1,1392.8 1685.5,1392.8 ; 1677.1,1393.85 1684.45,1393.85 ; 1677.1,1444.25 1684.45,1444.25 ; 1677.1,1445.3 1685.5,1445.3 ; 1678.15,1391.75 1685.5,1391.75 ; 1678.15,1446.35 1685.5,1446.35 ; 1679.2,1389.65 1686.55,1389.65 ; 1679.2,1390.7 1686.55,1390.7 ; 1679.2,1447.4 1685.5,1447.4 ; 1679.2,1448.45 1686.55,1448.45 ; 1680.25,1388.6 1687.6,1388.6 ; 1680.25,1449.5 1687.6,1449.5 ; 1681.3,1387.55 1687.6,1387.55 ; 1681.3,1450.55 1687.6,1450.55 ; 1682.35,1385.45 1688.65,1385.45 ; 1682.35,1386.5 1688.65,1386.5 ; 1682.35,1451.6 1688.65,1451.6 ; 1682.35,1452.65 1688.65,1452.65 ; 1683.4,1384.4 1689.7,1384.4 ; 1683.4,1453.7 1689.7,1453.7 ; 1684.45,1383.35 1690.75,1383.35 ; 1684.45,1454.75 1690.75,1454.75 ; 1685.5,1254.2 1696,1254.2 ; 1685.5,1255.25 1694.95,1255.25 ; 1685.5,1256.3 1694.95,1256.3 ; 1685.5,1257.35 1693.9,1257.35 ; 1685.5,1258.4 1693.9,1258.4 ; 1685.5,1259.45 1692.85,1259.45 ; 1685.5,1382.3 1690.75,1382.3 ; 1685.5,1455.8 1690.75,1455.8 ; 1686.55,1252.1 1697.05,1252.1 ; 1686.55,1253.15 1696,1253.15 ; 1686.55,1260.5 1692.85,1260.5 ; 1686.55,1381.25 1691.8,1381.25 ; 1686.55,1456.85 1691.8,1456.85 ; 1687.6,1251.05 1698.1,1251.05 ; 1687.6,1380.2 1692.85,1380.2 ; 1687.6,1457.9 1692.85,1457.9 ; 1688.65,1250 1699.15,1250 ; 1688.65,1379.15 1692.85,1379.15 ; 1688.65,1458.95 1692.85,1458.95 ; 1689.7,1248.95 1700.2,1248.95 ; 1689.7,1278.35 1692.85,1278.35 ; 1689.7,1279.4 1697.05,1279.4 ; 1689.7,1280.45 1725.4,1280.45 ; 1689.7,1281.5 1723.3,1281.5 ; 1689.7,1282.55 1722.25,1282.55 ; 1689.7,1283.6 1720.15,1283.6 ; 1689.7,1284.65 1718.05,1284.65 ; 1689.7,1285.7 1694.95,1285.7 ; 1689.7,1286.75 1694.95,1286.75 ; 1689.7,1287.8 1694.95,1287.8 ; 1689.7,1288.85 1694.95,1288.85 ; 1689.7,1378.1 1692.85,1378.1 ; 1689.7,1460 1692.85,1460 ; 1690.75,1247.9 1702.3,1247.9 ; 1690.75,1289.9 1694.95,1289.9 ; 1690.75,1290.95 1694.95,1290.95 ; 1690.75,1292 1694.95,1292 ; 1690.75,1293.05 1694.95,1293.05 ; 1690.75,1294.1 1694.95,1294.1 ; 1690.75,1295.15 1694.95,1295.15 ; 1690.75,1296.2 1694.95,1296.2 ; 1690.75,1297.25 1694.95,1297.25 ; 1690.75,1298.3 1694.95,1298.3 ; 1690.75,1299.35 1694.95,1299.35 ; 1690.75,1300.4 1694.95,1300.4 ; 1690.75,1301.45 1727.5,1301.45 ; 1690.75,1302.5 1727.5,1302.5 ; 1690.75,1303.55 1727.5,1303.55 ; 1690.75,1304.6 1727.5,1304.6 ; 1690.75,1305.65 1727.5,1305.65 ; 1690.75,1306.7 1727.5,1306.7 ; 1690.75,1307.75 1727.5,1307.75 ; 1690.75,1308.8 1727.5,1308.8 ; 1691.8,1246.85 1706.5,1246.85 ; 1693.9,1245.8 1721.2,1245.8 ; 1696,1244.75 1719.1,1244.75 ; 1699.15,1243.7 1715.95,1243.7 ; 1700.2,1285.7 1712.8,1285.7 ; 1705.45,1242.65 1709.65,1242.65 ; 1707.55,1406.45 1725.4,1406.45 ; 1708.6,1405.4 1725.4,1405.4 ; 1708.6,1436.9 1712.8,1436.9 ; 1709.65,1246.85 1722.25,1246.85 ; 1709.65,1435.85 1714.9,1435.85 ; 1709.65,1437.95 1710.7,1437.95 ; 1710.7,1279.4 1726.45,1279.4 ; 1710.7,1434.8 1717,1434.8 ; 1711.75,1404.35 1725.4,1404.35 ; 1711.75,1432.7 1721.2,1432.7 ; 1711.75,1433.75 1719.1,1433.75 ; 1712.8,1431.65 1722.25,1431.65 ; 1713.85,1247.9 1724.35,1247.9 ; 1713.85,1278.35 1727.5,1278.35 ; 1713.85,1428.5 1724.35,1428.5 ; 1713.85,1429.55 1723.3,1429.55 ; 1713.85,1430.6 1723.3,1430.6 ; 1714.9,1403.3 1724.35,1403.3 ; 1714.9,1426.4 1724.35,1426.4 ; 1714.9,1427.45 1724.35,1427.45 ; 1715.95,1248.95 1725.4,1248.95 ; 1715.95,1277.3 1728.55,1277.3 ; 1715.95,1380.2 1725.4,1380.2 ; 1715.95,1381.25 1725.4,1381.25 ; 1715.95,1382.3 1725.4,1382.3 ; 1715.95,1383.35 1725.4,1383.35 ; 1715.95,1384.4 1725.4,1384.4 ; 1715.95,1385.45 1725.4,1385.45 ; 1715.95,1386.5 1725.4,1386.5 ; 1715.95,1387.55 1725.4,1387.55 ; 1715.95,1401.2 1724.35,1401.2 ; 1715.95,1402.25 1724.35,1402.25 ; 1715.95,1407.5 1725.4,1407.5 ; 1715.95,1422.2 1722.25,1422.2 ; 1715.95,1423.25 1722.25,1423.25 ; 1715.95,1424.3 1723.3,1424.3 ; 1715.95,1425.35 1723.3,1425.35 ; 1715.95,1460 1723.3,1460 ; 1715.95,1461.05 1721.2,1461.05 ; 1715.95,1462.1 1717,1462.1 ; 1717,1379.15 1725.4,1379.15 ; 1717,1388.6 1725.4,1388.6 ; 1717,1389.65 1725.4,1389.65 ; 1717,1390.7 1725.4,1390.7 ; 1717,1391.75 1725.4,1391.75 ; 1717,1392.8 1725.4,1392.8 ; 1717,1393.85 1724.35,1393.85 ; 1717,1394.9 1724.35,1394.9 ; 1717,1395.95 1724.35,1395.95 ; 1717,1397 1724.35,1397 ; 1717,1398.05 1724.35,1398.05 ; 1717,1399.1 1724.35,1399.1 ; 1717,1400.15 1724.35,1400.15 ; 1717,1420.1 1720.15,1420.1 ; 1717,1421.15 1721.2,1421.15 ; 1717,1458.95 1725.4,1458.95 ; 1718.05,1250 1726.45,1250 ; 1718.05,1276.25 1728.55,1276.25 ; 1718.05,1378.1 1725.4,1378.1 ; 1718.05,1408.55 1725.4,1408.55 ; 1718.05,1457.9 1727.5,1457.9 ; 1719.1,1251.05 1727.5,1251.05 ; 1719.1,1275.2 1729.6,1275.2 ; 1719.1,1409.6 1726.45,1409.6 ; 1719.1,1455.8 1730.65,1455.8 ; 1719.1,1456.85 1729.6,1456.85 ; 1720.15,1252.1 1727.5,1252.1 ; 1720.15,1253.15 1728.55,1253.15 ; 1720.15,1274.15 1729.6,1274.15 ; 1720.15,1410.65 1726.45,1410.65 ; 1720.15,1454.75 1731.7,1454.75 ; 1721.2,1254.2 1729.6,1254.2 ; 1721.2,1272.05 1730.65,1272.05 ; 1721.2,1273.1 1730.65,1273.1 ; 1721.2,1377.05 1723.3,1377.05 ; 1721.2,1411.7 1726.45,1411.7 ; 1721.2,1412.75 1726.45,1412.75 ; 1721.2,1413.8 1727.5,1413.8 ; 1721.2,1452.65 1731.7,1452.65 ; 1721.2,1453.7 1731.7,1453.7 ; 1722.25,1255.25 1729.6,1255.25 ; 1722.25,1256.3 1730.65,1256.3 ; 1722.25,1269.95 1731.7,1269.95 ; 1722.25,1271 1731.7,1271 ; 1722.25,1414.85 1727.5,1414.85 ; 1722.25,1415.9 1727.5,1415.9 ; 1722.25,1450.55 1731.7,1450.55 ; 1722.25,1451.6 1731.7,1451.6 ; 1723.3,1257.35 1730.65,1257.35 ; 1723.3,1258.4 1731.7,1258.4 ; 1723.3,1259.45 1731.7,1259.45 ; 1723.3,1260.5 1731.7,1260.5 ; 1723.3,1261.55 1731.7,1261.55 ; 1723.3,1264.7 1731.7,1264.7 ; 1723.3,1265.75 1731.7,1265.75 ; 1723.3,1266.8 1731.7,1266.8 ; 1723.3,1267.85 1731.7,1267.85 ; 1723.3,1268.9 1731.7,1268.9 ; 1723.3,1416.95 1728.55,1416.95 ; 1723.3,1418 1728.55,1418 ; 1723.3,1447.4 1730.65,1447.4 ; 1723.3,1448.45 1731.7,1448.45 ; 1723.3,1449.5 1731.7,1449.5 ; 1724.35,1262.6 1731.7,1262.6 ; 1724.35,1263.65 1731.7,1263.65 ; 1724.35,1309.85 1727.5,1309.85 ; 1724.35,1419.05 1728.55,1419.05 ; 1724.35,1420.1 1729.6,1420.1 ; 1724.35,1445.3 1729.6,1445.3 ; 1724.35,1446.35 1730.65,1446.35 ; 1725.4,1421.15 1729.6,1421.15 ; 1725.4,1422.2 1729.6,1422.2 ; 1725.4,1444.25 1728.55,1444.25 ; 1726.45,1423.25 1729.6,1423.25 ; 1726.45,1424.3 1730.65,1424.3 ; 1726.45,1425.35 1730.65,1425.35 ; 1727.5,1380.2 1730.65,1380.2 ; 1727.5,1426.4 1730.65,1426.4 ; 1727.5,1427.45 1731.7,1427.45 ; 1728.55,1381.25 1731.7,1381.25 ; 1728.55,1428.5 1731.7,1428.5 ; 1728.55,1429.55 1731.7,1429.55 ; 1729.6,1382.3 1733.8,1382.3 ; 1729.6,1430.6 1732.75,1430.6 ; 1729.6,1431.65 1732.75,1431.65 ; 1730.65,1383.35 1735.9,1383.35 ; 1730.65,1432.7 1732.75,1432.7 ; 1730.65,1433.75 1732.75,1433.75 ; 1730.65,1434.8 1733.8,1434.8 ; 1731.7,1384.4 1736.95,1384.4 ; 1731.7,1435.85 1733.8,1435.85 ; 1731.7,1436.9 1733.8,1436.9 ; 1732.75,1385.45 1738,1385.45 ; 1732.75,1437.95 1734.85,1437.95 ; 1733.8,1386.5 1740.1,1386.5 ; 1733.8,1415.9 1793.65,1415.9 ; 1734.85,1387.55 1741.15,1387.55 ; 1734.85,1413.8 1793.65,1413.8 ; 1734.85,1414.85 1793.65,1414.85 ; 1734.85,1421.15 1736.95,1421.15 ; 1734.85,1422.2 1738,1422.2 ; 1734.85,1440.05 1743.25,1440.05 ; 1734.85,1441.1 1744.3,1441.1 ; 1734.85,1442.15 1745.35,1442.15 ; 1734.85,1443.2 1746.4,1443.2 ; 1735.9,1388.6 1742.2,1388.6 ; 1735.9,1423.25 1740.1,1423.25 ; 1735.9,1439 1742.2,1439 ; 1735.9,1444.25 1746.4,1444.25 ; 1736.95,1389.65 1743.25,1389.65 ; 1736.95,1424.3 1741.15,1424.3 ; 1736.95,1445.3 1746.4,1445.3 ; 1738,1390.7 1745.35,1390.7 ; 1738,1425.35 1742.2,1425.35 ; 1738,1446.35 1746.4,1446.35 ; 1739.05,1391.75 1746.4,1391.75 ; 1739.05,1426.4 1744.3,1426.4 ; 1739.05,1447.4 1746.4,1447.4 ; 1739.05,1448.45 1746.4,1448.45 ; 1740.1,1392.8 1747.45,1392.8 ; 1740.1,1427.45 1745.35,1427.45 ; 1740.1,1449.5 1746.4,1449.5 ; 1741.15,1393.85 1748.5,1393.85 ; 1741.15,1428.5 1746.4,1428.5 ; 1741.15,1429.55 1748.5,1429.55 ; 1741.15,1450.55 1746.4,1450.55 ; 1741.15,1451.6 1746.4,1451.6 ; 1742.2,1394.9 1749.55,1394.9 ; 1742.2,1395.95 1750.6,1395.95 ; 1742.2,1430.6 1749.55,1430.6 ; 1742.2,1452.65 1794.7,1452.65 ; 1742.2,1453.7 1793.65,1453.7 ; 1742.2,1454.75 1792.6,1454.75 ; 1743.25,1397 1751.65,1397 ; 1743.25,1431.65 1750.6,1431.65 ; 1743.25,1455.8 1746.4,1455.8 ; 1743.25,1456.85 1746.4,1456.85 ; 1743.25,1457.9 1746.4,1457.9 ; 1743.25,1458.95 1746.4,1458.95 ; 1743.25,1460 1746.4,1460 ; 1744.3,1398.05 1752.7,1398.05 ; 1744.3,1432.7 1751.65,1432.7 ; 1745.35,1399.1 1752.7,1399.1 ; 1745.35,1433.75 1752.7,1433.75 ; 1745.35,1434.8 1753.75,1434.8 ; 1746.4,1400.15 1753.75,1400.15 ; 1746.4,1401.2 1754.8,1401.2 ; 1746.4,1435.85 1754.8,1435.85 ; 1747.45,1402.25 1755.85,1402.25 ; 1747.45,1436.9 1755.85,1436.9 ; 1747.45,1437.95 1756.9,1437.95 ; 1748.5,1403.3 1756.9,1403.3 ; 1748.5,1439 1757.95,1439 ; 1749.55,1404.35 1756.9,1404.35 ; 1749.55,1405.4 1765.3,1405.4 ; 1749.55,1440.05 1762.15,1440.05 ; 1749.55,1441.1 1762.15,1441.1 ; 1750.6,1406.45 1765.3,1406.45 ; 1750.6,1442.15 1762.15,1442.15 ; 1751.65,1407.5 1765.3,1407.5 ; 1751.65,1408.55 1765.3,1408.55 ; 1751.65,1443.2 1760.05,1443.2 ; 1751.65,1444.25 1759,1444.25 ; 1752.7,1409.6 1765.3,1409.6 ; 1752.7,1445.3 1756.9,1445.3 ; 1752.7,1446.35 1755.85,1446.35 ; 1753.75,1410.65 1765.3,1410.65 ; 1753.75,1411.7 1765.3,1411.7 ; 1754.8,1412.75 1765.3,1412.75 ; 1757.95,1376 1761.1,1376 ; 1757.95,1377.05 1764.25,1377.05 ; 1757.95,1378.1 1765.3,1378.1 ; 1757.95,1379.15 1766.35,1379.15 ; 1757.95,1380.2 1766.35,1380.2 ; 1757.95,1381.25 1766.35,1381.25 ; 1757.95,1382.3 1766.35,1382.3 ; 1757.95,1383.35 1765.3,1383.35 ; 1757.95,1384.4 1765.3,1384.4 ; 1757.95,1385.45 1765.3,1385.45 ; 1757.95,1386.5 1765.3,1386.5 ; 1757.95,1387.55 1765.3,1387.55 ; 1757.95,1388.6 1765.3,1388.6 ; 1757.95,1389.65 1765.3,1389.65 ; 1757.95,1390.7 1765.3,1390.7 ; 1757.95,1391.75 1765.3,1391.75 ; 1757.95,1392.8 1765.3,1392.8 ; 1757.95,1393.85 1765.3,1393.85 ; 1757.95,1394.9 1765.3,1394.9 ; 1757.95,1395.95 1765.3,1395.95 ; 1757.95,1397 1765.3,1397 ; 1757.95,1398.05 1765.3,1398.05 ; 1757.95,1399.1 1765.3,1399.1 ; 1757.95,1400.15 1765.3,1400.15 ; 1757.95,1401.2 1765.3,1401.2 ; 1757.95,1402.25 1765.3,1402.25 ; 1757.95,1403.3 1765.3,1403.3 ; 1757.95,1404.35 1765.3,1404.35 ; 1757.95,1416.95 1765.3,1416.95 ; 1757.95,1418 1765.3,1418 ; 1757.95,1419.05 1765.3,1419.05 ; 1757.95,1420.1 1765.3,1420.1 ; 1757.95,1421.15 1765.3,1421.15 ; 1757.95,1422.2 1765.3,1422.2 ; 1757.95,1423.25 1765.3,1423.25 ; 1757.95,1424.3 1765.3,1424.3 ; 1757.95,1425.35 1766.35,1425.35 ; 1757.95,1426.4 1767.4,1426.4 ; 1757.95,1427.45 1769.5,1427.45 ; 1757.95,1428.5 1769.5,1428.5 ; 1757.95,1429.55 1768.45,1429.55 ; 1757.95,1430.6 1766.35,1430.6 ; 1757.95,1431.65 1762.15,1431.65 ; 1765.3,1445.3 1768.45,1445.3 ; 1766.35,1444.25 1771.6,1444.25 ; 1767.4,1443.2 1774.75,1443.2 ; 1768.45,1409.6 1772.65,1409.6 ; 1768.45,1410.65 1771.6,1410.65 ; 1768.45,1411.7 1771.6,1411.7 ; 1768.45,1412.75 1770.55,1412.75 ; 1768.45,1442.15 1776.85,1442.15 ; 1769.5,1230.05 1774.75,1230.05 ; 1769.5,1231.1 1776.85,1231.1 ; 1769.5,1309.85 1773.7,1309.85 ; 1769.5,1310.9 1770.55,1310.9 ; 1769.5,1405.4 1774.75,1405.4 ; 1769.5,1406.45 1773.7,1406.45 ; 1769.5,1407.5 1773.7,1407.5 ; 1769.5,1408.55 1772.65,1408.55 ; 1769.5,1441.1 1778.95,1441.1 ; 1770.55,1229 1771.6,1229 ; 1770.55,1232.15 1777.9,1232.15 ; 1770.55,1233.2 1777.9,1233.2 ; 1770.55,1234.25 1777.9,1234.25 ; 1770.55,1235.3 1777.9,1235.3 ; 1770.55,1236.35 1777.9,1236.35 ; 1770.55,1237.4 1777.9,1237.4 ; 1770.55,1238.45 1777.9,1238.45 ; 1770.55,1239.5 1777.9,1239.5 ; 1770.55,1240.55 1777.9,1240.55 ; 1770.55,1241.6 1777.9,1241.6 ; 1770.55,1242.65 1777.9,1242.65 ; 1770.55,1243.7 1777.9,1243.7 ; 1770.55,1244.75 1777.9,1244.75 ; 1770.55,1245.8 1777.9,1245.8 ; 1770.55,1246.85 1777.9,1246.85 ; 1770.55,1247.9 1777.9,1247.9 ; 1770.55,1248.95 1777.9,1248.95 ; 1770.55,1250 1777.9,1250 ; 1770.55,1251.05 1777.9,1251.05 ; 1770.55,1252.1 1777.9,1252.1 ; 1770.55,1253.15 1777.9,1253.15 ; 1770.55,1254.2 1777.9,1254.2 ; 1770.55,1255.25 1777.9,1255.25 ; 1770.55,1256.3 1777.9,1256.3 ; 1770.55,1257.35 1777.9,1257.35 ; 1770.55,1258.4 1777.9,1258.4 ; 1770.55,1259.45 1777.9,1259.45 ; 1770.55,1260.5 1777.9,1260.5 ; 1770.55,1261.55 1777.9,1261.55 ; 1770.55,1262.6 1777.9,1262.6 ; 1770.55,1263.65 1777.9,1263.65 ; 1770.55,1264.7 1777.9,1264.7 ; 1770.55,1265.75 1777.9,1265.75 ; 1770.55,1266.8 1777.9,1266.8 ; 1770.55,1267.85 1777.9,1267.85 ; 1770.55,1268.9 1777.9,1268.9 ; 1770.55,1269.95 1777.9,1269.95 ; 1770.55,1271 1777.9,1271 ; 1770.55,1272.05 1777.9,1272.05 ; 1770.55,1273.1 1777.9,1273.1 ; 1770.55,1274.15 1777.9,1274.15 ; 1770.55,1275.2 1777.9,1275.2 ; 1770.55,1276.25 1777.9,1276.25 ; 1770.55,1277.3 1777.9,1277.3 ; 1770.55,1278.35 1777.9,1278.35 ; 1770.55,1279.4 1777.9,1279.4 ; 1770.55,1280.45 1777.9,1280.45 ; 1770.55,1281.5 1777.9,1281.5 ; 1770.55,1282.55 1777.9,1282.55 ; 1770.55,1283.6 1777.9,1283.6 ; 1770.55,1284.65 1777.9,1284.65 ; 1770.55,1285.7 1777.9,1285.7 ; 1770.55,1286.75 1777.9,1286.75 ; 1770.55,1287.8 1777.9,1287.8 ; 1770.55,1288.85 1777.9,1288.85 ; 1770.55,1289.9 1777.9,1289.9 ; 1770.55,1290.95 1777.9,1290.95 ; 1770.55,1292 1777.9,1292 ; 1770.55,1293.05 1777.9,1293.05 ; 1770.55,1294.1 1777.9,1294.1 ; 1770.55,1295.15 1777.9,1295.15 ; 1770.55,1296.2 1777.9,1296.2 ; 1770.55,1297.25 1777.9,1297.25 ; 1770.55,1298.3 1777.9,1298.3 ; 1770.55,1299.35 1777.9,1299.35 ; 1770.55,1300.4 1777.9,1300.4 ; 1770.55,1301.45 1777.9,1301.45 ; 1770.55,1302.5 1777.9,1302.5 ; 1770.55,1303.55 1777.9,1303.55 ; 1770.55,1304.6 1803.1,1304.6 ; 1770.55,1305.65 1803.1,1305.65 ; 1770.55,1306.7 1802.05,1306.7 ; 1770.55,1307.75 1778.95,1307.75 ; 1770.55,1308.8 1776.85,1308.8 ; 1770.55,1402.25 1776.85,1402.25 ; 1770.55,1403.3 1775.8,1403.3 ; 1770.55,1404.35 1775.8,1404.35 ; 1770.55,1440.05 1781.05,1440.05 ; 1771.6,1400.15 1778.95,1400.15 ; 1771.6,1401.2 1777.9,1401.2 ; 1771.6,1439 1783.15,1439 ; 1772.65,1397 1782.1,1397 ; 1772.65,1398.05 1781.05,1398.05 ; 1772.65,1399.1 1780,1399.1 ; 1772.65,1437.95 1784.2,1437.95 ; 1773.7,1395.95 1783.15,1395.95 ; 1773.7,1436.9 1785.25,1436.9 ; 1774.75,1393.85 1785.25,1393.85 ; 1774.75,1394.9 1784.2,1394.9 ; 1774.75,1435.85 1786.3,1435.85 ; 1775.8,1391.75 1789.45,1391.75 ; 1775.8,1392.8 1787.35,1392.8 ; 1775.8,1434.8 1787.35,1434.8 ; 1776.85,1390.7 1791.55,1390.7 ; 1776.85,1433.75 1787.35,1433.75 ; 1777.9,1388.6 1795.75,1388.6 ; 1777.9,1389.65 1793.65,1389.65 ; 1777.9,1432.7 1787.35,1432.7 ; 1778.95,1260.5 1783.15,1260.5 ; 1778.95,1387.55 1795.75,1387.55 ; 1778.95,1431.65 1787.35,1431.65 ; 1778.95,1442.15 1781.05,1442.15 ; 1778.95,1443.2 1782.1,1443.2 ; 1778.95,1444.25 1783.15,1444.25 ; 1780,1259.45 1799.95,1259.45 ; 1780,1386.5 1790.5,1386.5 ; 1780,1430.6 1787.35,1430.6 ; 1780,1445.3 1784.2,1445.3 ; 1780,1446.35 1785.25,1446.35 ; 1780,1447.4 1786.3,1447.4 ; 1781.05,1227.95 1783.15,1227.95 ; 1781.05,1229 1785.25,1229 ; 1781.05,1385.45 1788.4,1385.45 ; 1781.05,1416.95 1792.6,1416.95 ; 1781.05,1418 1791.55,1418 ; 1781.05,1428.5 1787.35,1428.5 ; 1781.05,1429.55 1787.35,1429.55 ; 1781.05,1448.45 1788.4,1448.45 ; 1781.05,1449.5 1794.7,1449.5 ; 1781.05,1450.55 1795.75,1450.55 ; 1782.1,1230.05 1786.3,1230.05 ; 1782.1,1258.4 1799.95,1258.4 ; 1782.1,1384.4 1787.35,1384.4 ; 1782.1,1419.05 1790.5,1419.05 ; 1782.1,1427.45 1786.3,1427.45 ; 1782.1,1451.6 1795.75,1451.6 ; 1782.1,1455.8 1792.6,1455.8 ; 1783.15,1231.1 1788.4,1231.1 ; 1783.15,1282.55 1787.35,1282.55 ; 1783.15,1383.35 1786.3,1383.35 ; 1783.15,1420.1 1789.45,1420.1 ; 1783.15,1421.15 1787.35,1421.15 ; 1783.15,1426.4 1786.3,1426.4 ; 1783.15,1456.85 1791.55,1456.85 ; 1783.15,1457.9 1790.5,1457.9 ; 1784.2,1232.15 1790.5,1232.15 ; 1784.2,1257.35 1798.9,1257.35 ; 1784.2,1281.5 1789.45,1281.5 ; 1784.2,1283.6 1788.4,1283.6 ; 1784.2,1284.65 1788.4,1284.65 ; 1784.2,1285.7 1789.45,1285.7 ; 1784.2,1422.2 1786.3,1422.2 ; 1784.2,1458.95 1789.45,1458.95 ; 1785.25,1256.3 1797.85,1256.3 ; 1785.25,1280.45 1790.5,1280.45 ; 1785.25,1286.75 1790.5,1286.75 ; 1785.25,1287.8 1790.5,1287.8 ; 1785.25,1460 1787.35,1460 ; 1786.3,1233.2 1791.55,1233.2 ; 1786.3,1254.2 1796.8,1254.2 ; 1786.3,1255.25 1797.85,1255.25 ; 1786.3,1279.4 1792.6,1279.4 ; 1786.3,1288.85 1791.55,1288.85 ; 1786.3,1289.9 1791.55,1289.9 ; 1786.3,1290.95 1792.6,1290.95 ; 1787.35,1234.25 1793.65,1234.25 ; 1787.35,1251.05 1791.55,1251.05 ; 1787.35,1252.1 1793.65,1252.1 ; 1787.35,1253.15 1794.7,1253.15 ; 1787.35,1278.35 1793.65,1278.35 ; 1787.35,1292 1793.65,1292 ; 1787.35,1293.05 1793.65,1293.05 ; 1787.35,1294.1 1794.7,1294.1 ; 1788.4,1235.3 1794.7,1235.3 ; 1788.4,1260.5 1799.95,1260.5 ; 1788.4,1276.25 1795.75,1276.25 ; 1788.4,1277.3 1794.7,1277.3 ; 1788.4,1295.15 1794.7,1295.15 ; 1788.4,1296.2 1795.75,1296.2 ; 1788.4,1297.25 1795.75,1297.25 ; 1789.45,1236.35 1796.8,1236.35 ; 1789.45,1275.2 1796.8,1275.2 ; 1789.45,1298.3 1796.8,1298.3 ; 1789.45,1299.35 1797.85,1299.35 ; 1789.45,1300.4 1797.85,1300.4 ; 1789.45,1301.45 1798.9,1301.45 ; 1790.5,1237.4 1797.85,1237.4 ; 1790.5,1261.55 1801,1261.55 ; 1790.5,1273.1 1797.85,1273.1 ; 1790.5,1274.15 1797.85,1274.15 ; 1790.5,1302.5 1799.95,1302.5 ; 1790.5,1303.55 1802.05,1303.55 ; 1790.5,1307.75 1799.95,1307.75 ; 1791.55,1238.45 1798.9,1238.45 ; 1791.55,1262.6 1801,1262.6 ; 1791.55,1263.65 1801,1263.65 ; 1791.55,1269.95 1799.95,1269.95 ; 1791.55,1271 1798.9,1271 ; 1791.55,1272.05 1798.9,1272.05 ; 1791.55,1308.8 1798.9,1308.8 ; 1792.6,1239.5 1801,1239.5 ; 1792.6,1264.7 1801,1264.7 ; 1792.6,1265.75 1801,1265.75 ; 1792.6,1266.8 1801,1266.8 ; 1792.6,1267.85 1801,1267.85 ; 1792.6,1268.9 1799.95,1268.9 ; 1792.6,1309.85 1796.8,1309.85 ; 1792.6,1310.9 1794.7,1310.9 ; 1793.65,1240.55 1802.05,1240.55 ; 1794.7,1241.6 1803.1,1241.6 ; 1795.75,1242.65 1804.15,1242.65 ; 1796.8,1243.7 1805.2,1243.7 ; 1797.85,1244.75 1806.25,1244.75 ; 1798.9,1245.8 1806.25,1245.8 ; 1798.9,1246.85 1807.3,1246.85 ; 1799.95,1247.9 1808.35,1247.9 ; 1801,1248.95 1809.4,1248.95 ; 1801,1250 1809.4,1250 ; 1802.05,1251.05 1810.45,1251.05 ; 1802.05,1252.1 1810.45,1252.1 ; 1802.05,1399.1 1819.9,1399.1 ; 1803.1,1253.15 1811.5,1253.15 ; 1803.1,1254.2 1811.5,1254.2 ; 1803.1,1397 1816.75,1397 ; 1803.1,1398.05 1818.85,1398.05 ; 1803.1,1400.15 1822,1400.15 ; 1804.15,1255.25 1812.55,1255.25 ; 1804.15,1256.3 1812.55,1256.3 ; 1804.15,1394.9 1813.6,1394.9 ; 1804.15,1395.95 1814.65,1395.95 ; 1804.15,1433.75 1839.85,1433.75 ; 1804.15,1434.8 1839.85,1434.8 ; 1805.2,1257.35 1813.6,1257.35 ; 1805.2,1258.4 1813.6,1258.4 ; 1805.2,1259.45 1813.6,1259.45 ; 1805.2,1392.8 1810.45,1392.8 ; 1805.2,1393.85 1811.5,1393.85 ; 1805.2,1432.7 1839.85,1432.7 ; 1806.25,1260.5 1814.65,1260.5 ; 1806.25,1261.55 1814.65,1261.55 ; 1806.25,1262.6 1814.65,1262.6 ; 1806.25,1391.75 1809.4,1391.75 ; 1806.25,1401.2 1824.1,1401.2 ; 1807.3,1263.65 1814.65,1263.65 ; 1807.3,1264.7 1815.7,1264.7 ; 1807.3,1265.75 1815.7,1265.75 ; 1807.3,1266.8 1815.7,1266.8 ; 1807.3,1390.7 1808.35,1390.7 ; 1808.35,1267.85 1815.7,1267.85 ; 1808.35,1268.9 1816.75,1268.9 ; 1808.35,1269.95 1816.75,1269.95 ; 1808.35,1271 1816.75,1271 ; 1808.35,1272.05 1816.75,1272.05 ; 1809.4,1273.1 1816.75,1273.1 ; 1809.4,1274.15 1817.8,1274.15 ; 1809.4,1275.2 1817.8,1275.2 ; 1809.4,1276.25 1817.8,1276.25 ; 1809.4,1277.3 1817.8,1277.3 ; 1809.4,1278.35 1817.8,1278.35 ; 1809.4,1279.4 1817.8,1279.4 ; 1810.45,1280.45 1818.85,1280.45 ; 1810.45,1281.5 1818.85,1281.5 ; 1810.45,1282.55 1818.85,1282.55 ; 1810.45,1283.6 1818.85,1283.6 ; 1810.45,1284.65 1818.85,1284.65 ; 1810.45,1285.7 1818.85,1285.7 ; 1810.45,1286.75 1819.9,1286.75 ; 1810.45,1287.8 1819.9,1287.8 ; 1810.45,1402.25 1826.2,1402.25 ; 1811.5,1288.85 1819.9,1288.85 ; 1811.5,1289.9 1819.9,1289.9 ; 1811.5,1290.95 1819.9,1290.95 ; 1811.5,1292 1819.9,1292 ; 1811.5,1293.05 1819.9,1293.05 ; 1811.5,1294.1 1819.9,1294.1 ; 1811.5,1295.15 1819.9,1295.15 ; 1811.5,1296.2 1823.05,1296.2 ; 1811.5,1297.25 1823.05,1297.25 ; 1811.5,1298.3 1823.05,1298.3 ; 1812.55,1299.35 1823.05,1299.35 ; 1812.55,1300.4 1823.05,1300.4 ; 1812.55,1301.45 1823.05,1301.45 ; 1812.55,1302.5 1823.05,1302.5 ; 1812.55,1303.55 1823.05,1303.55 ; 1812.55,1304.6 1823.05,1304.6 ; 1812.55,1305.65 1823.05,1305.65 ; 1812.55,1306.7 1824.1,1306.7 ; 1812.55,1307.75 1826.2,1307.75 ; 1812.55,1308.8 1826.2,1308.8 ; 1812.55,1309.85 1824.1,1309.85 ; 1812.55,1310.9 1819.9,1310.9 ; 1812.55,1311.95 1815.7,1311.95 ; 1813.6,1403.3 1828.3,1403.3 ; 1816.75,1404.35 1830.4,1404.35 ; 1817.8,1405.4 1832.5,1405.4 ; 1817.8,1406.45 1833.55,1406.45 ; 1817.8,1407.5 1825.15,1407.5 ; 1817.8,1408.55 1825.15,1408.55 ; 1817.8,1409.6 1825.15,1409.6 ; 1817.8,1410.65 1825.15,1410.65 ; 1817.8,1411.7 1825.15,1411.7 ; 1817.8,1412.75 1825.15,1412.75 ; 1817.8,1413.8 1825.15,1413.8 ; 1817.8,1414.85 1825.15,1414.85 ; 1817.8,1415.9 1825.15,1415.9 ; 1817.8,1416.95 1825.15,1416.95 ; 1817.8,1418 1825.15,1418 ; 1817.8,1419.05 1825.15,1419.05 ; 1817.8,1420.1 1825.15,1420.1 ; 1817.8,1421.15 1825.15,1421.15 ; 1817.8,1422.2 1825.15,1422.2 ; 1817.8,1423.25 1825.15,1423.25 ; 1817.8,1424.3 1825.15,1424.3 ; 1817.8,1425.35 1825.15,1425.35 ; 1817.8,1426.4 1825.15,1426.4 ; 1817.8,1427.45 1825.15,1427.45 ; 1817.8,1428.5 1825.15,1428.5 ; 1817.8,1429.55 1825.15,1429.55 ; 1817.8,1430.6 1825.15,1430.6 ; 1817.8,1431.65 1825.15,1431.65 ; 1817.8,1435.85 1825.15,1435.85 ; 1817.8,1436.9 1825.15,1436.9 ; 1817.8,1437.95 1825.15,1437.95 ; 1817.8,1439 1825.15,1439 ; 1817.8,1440.05 1825.15,1440.05 ; 1817.8,1441.1 1825.15,1441.1 ; 1817.8,1442.15 1825.15,1442.15 ; 1817.8,1443.2 1825.15,1443.2 ; 1817.8,1444.25 1825.15,1444.25 ; 1817.8,1445.3 1825.15,1445.3 ; 1817.8,1446.35 1825.15,1446.35 ; 1817.8,1447.4 1825.15,1447.4 ; 1817.8,1448.45 1825.15,1448.45 ; 1817.8,1449.5 1825.15,1449.5 ; 1817.8,1450.55 1825.15,1450.55 ; 1817.8,1451.6 1825.15,1451.6 ; 1817.8,1452.65 1825.15,1452.65 ; 1817.8,1453.7 1825.15,1453.7 ; 1817.8,1454.75 1825.15,1454.75 ; 1817.8,1455.8 1825.15,1455.8 ; 1817.8,1456.85 1827.25,1456.85 ; 1817.8,1457.9 1828.3,1457.9 ; 1817.8,1458.95 1828.3,1458.95 ; 1817.8,1460 1827.25,1460 ; 1817.8,1461.05 1824.1,1461.05 ; 1817.8,1462.1 1820.95,1462.1 ; 1820.95,1284.65 1825.15,1284.65 ; 1820.95,1285.7 1825.15,1285.7 ; 1820.95,1286.75 1825.15,1286.75 ; 1820.95,1287.8 1824.1,1287.8 ; 1820.95,1288.85 1824.1,1288.85 ; 1820.95,1289.9 1824.1,1289.9 ; 1820.95,1290.95 1824.1,1290.95 ; 1820.95,1292 1824.1,1292 ; 1820.95,1293.05 1824.1,1293.05 ; 1820.95,1294.1 1824.1,1294.1 ; 1820.95,1295.15 1823.05,1295.15 ; 1820.95,1376 1823.05,1376 ; 1820.95,1377.05 1824.1,1377.05 ; 1822,1272.05 1827.25,1272.05 ; 1822,1273.1 1827.25,1273.1 ; 1822,1274.15 1827.25,1274.15 ; 1822,1275.2 1827.25,1275.2 ; 1822,1276.25 1826.2,1276.25 ; 1822,1277.3 1826.2,1277.3 ; 1822,1278.35 1826.2,1278.35 ; 1822,1279.4 1826.2,1279.4 ; 1822,1280.45 1826.2,1280.45 ; 1822,1281.5 1825.15,1281.5 ; 1822,1282.55 1825.15,1282.55 ; 1822,1283.6 1825.15,1283.6 ; 1822,1378.1 1826.2,1378.1 ; 1823.05,1264.7 1830.4,1264.7 ; 1823.05,1265.75 1829.35,1265.75 ; 1823.05,1266.8 1829.35,1266.8 ; 1823.05,1267.85 1829.35,1267.85 ; 1823.05,1268.9 1828.3,1268.9 ; 1823.05,1269.95 1828.3,1269.95 ; 1823.05,1271 1828.3,1271 ; 1824.1,1259.45 1832.5,1259.45 ; 1824.1,1260.5 1831.45,1260.5 ; 1824.1,1261.55 1831.45,1261.55 ; 1824.1,1262.6 1830.4,1262.6 ; 1824.1,1263.65 1830.4,1263.65 ; 1824.1,1379.15 1828.3,1379.15 ; 1825.15,1255.25 1834.6,1255.25 ; 1825.15,1256.3 1833.55,1256.3 ; 1825.15,1257.35 1833.55,1257.35 ; 1825.15,1258.4 1832.5,1258.4 ; 1825.15,1380.2 1829.35,1380.2 ; 1826.2,1252.1 1835.65,1252.1 ; 1826.2,1253.15 1835.65,1253.15 ; 1826.2,1254.2 1834.6,1254.2 ; 1826.2,1381.25 1831.45,1381.25 ; 1827.25,1248.95 1837.75,1248.95 ; 1827.25,1250 1837.75,1250 ; 1827.25,1251.05 1836.7,1251.05 ; 1827.25,1382.3 1832.5,1382.3 ; 1827.25,1407.5 1835.65,1407.5 ; 1828.3,1246.85 1839.85,1246.85 ; 1828.3,1247.9 1838.8,1247.9